# Altium PCB W5500_PCB.PcbDoc
Units mm, origin at the board's own origin, x right, y up, seen from the top; angles counter-clockwise.
Board outline 55.12 x 31.24 mm, 2 copper layers (Top Layer, Bottom Layer); 44 components, 37 nets, 156 pads, 37 vias.
Unrouted connection lines stored in the file: 1.
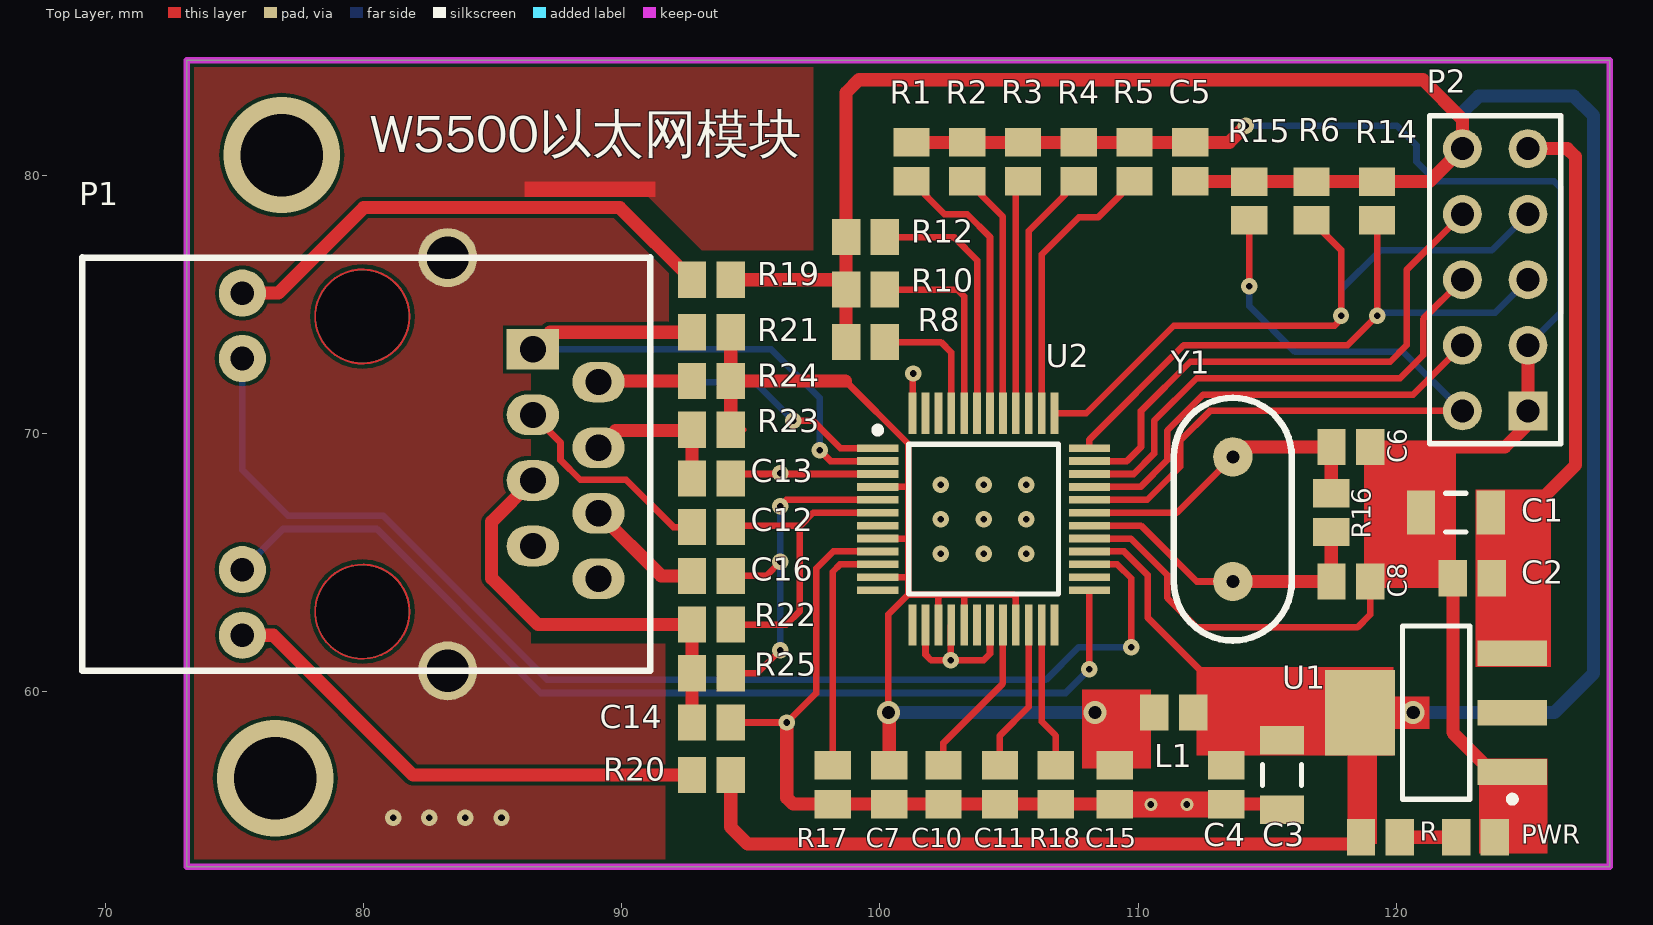
[diagram p0: Top Layer view]
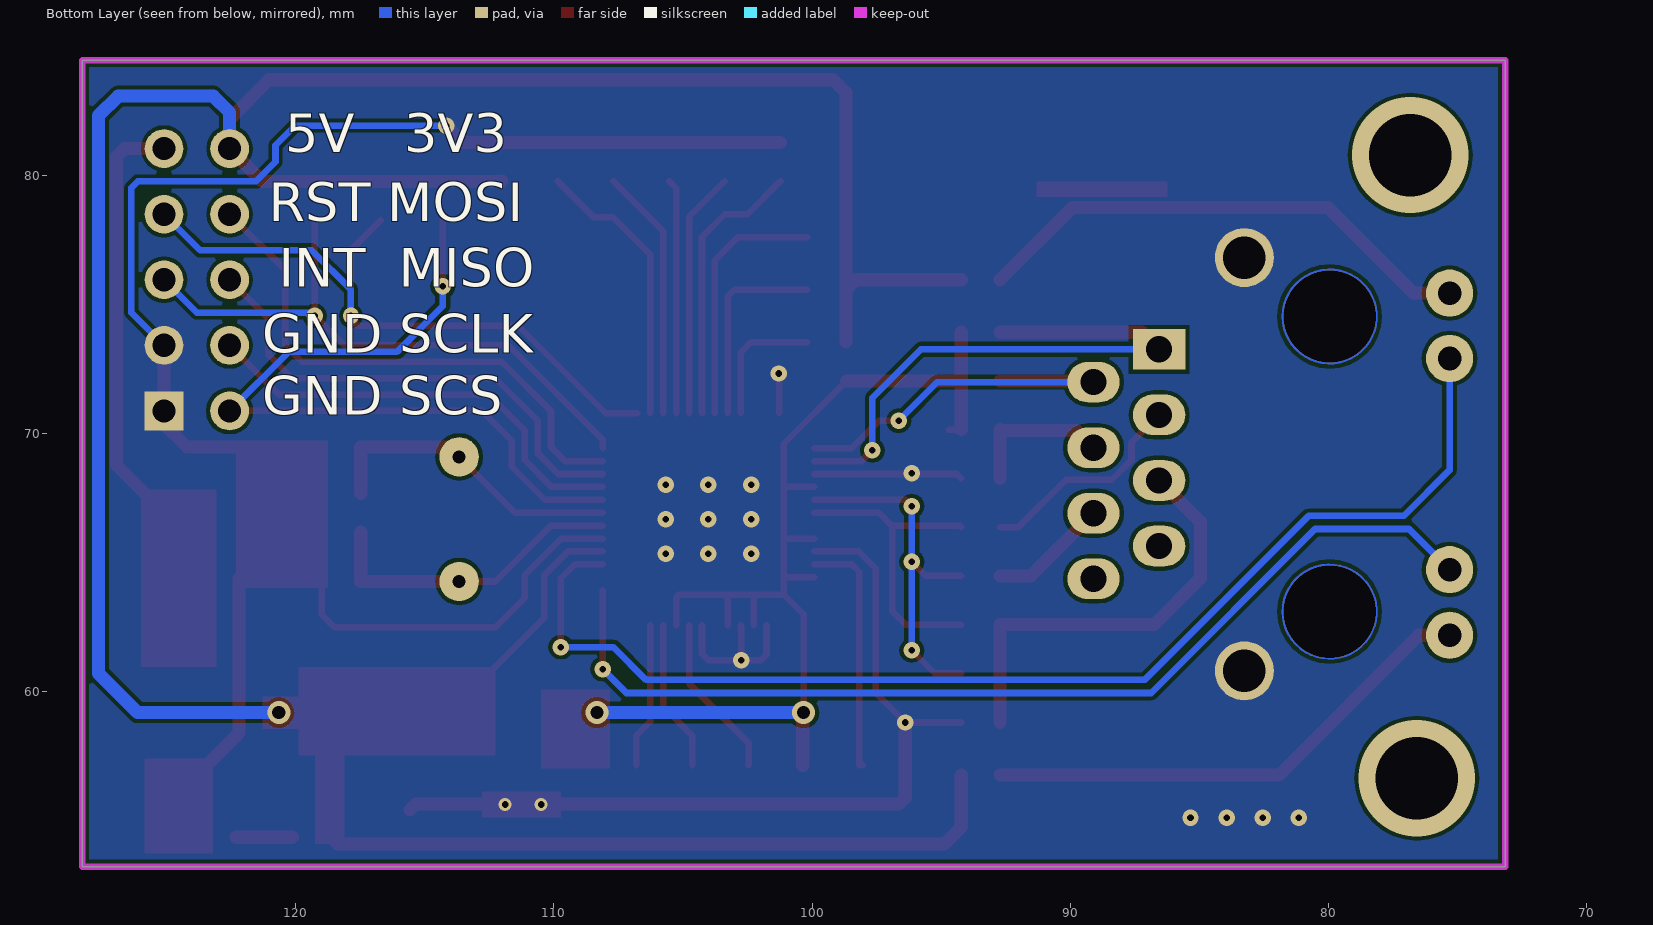
[diagram p1: Bottom Layer view, seen from below]

## Layer stack, top to bottom
Top Solder: solder mask 0.0102, Solder Resist, Dk 3.5
Top Layer: signal copper 0.0356
Dielectric 1: dielectric 0.32, FR-4, Dk 4.8
Bottom Layer: signal copper 0.0356
Bottom Solder: solder mask 0.0102, Solder Resist, Dk 3.5

## Board outline
73.152,53.213 73.152,84.455 128.27,84.455 128.27,53.213

## Design rules (kind name [scope] priority, off if disabled: settings)
Clearance [All] p1: gap=0.152 ignorepadtopadclearanceinfootprint=FALSE
DiffPairsRouting [All] p1: maxlimit=0.254 minlimit=0.127 mostfreqgap=0.254 toplayer_minwidth=0.051 toplayer_maxwidth=0.381 toplayer_prefwidth=0.381 bottomlayer_minwidth=0.051 bottomlayer_maxwidth=0.381 bottomlayer_prefwidth=0.381 maxuncoupledlength=12.7
PolygonConnect [All] p1: connectstyle=Direct reliefconductorwidth=0.254 reliefentries=4 polygonreliefangle="90 Angle" airgapwidth=0.254
RoutingVias [All] p1: holewidth=0.711 width=1.27 viastyle="Through Hole" minholewidth=5.08 minwidth=12.7 maxholewidth=0 maxwidth=0
SolderMaskExpansion [All] p1: expansion=0.076 istentingtop=FALSE
Width [All] p1: maxlimit=1.27 minlimit=0.254 preferedwidth=0.254
29 further rules are at their usual default settings.

## Components (designator, comment, footprint, x,y, rotation, side; value= is the part's Value field where it differs from the comment)
C1 "tanCap" C1206 122.301,66.929 r180 top value=10uF
C2 "Cap" C0805 122.936,64.389 r180 top value=0.1uF
C3 "tanCap" C1206 115.57,56.769 r270 top value=10uF
C4 "Cap" C0805 113.411,56.388 r270 top value=0.1uF
C5 "Cap" C0805 112.014,80.518 r90 top value=0.1uF
C6 "Cap" C0805 118.237,69.469 r180 top value=18pF
C7 "Cap" C0805 100.362,56.388 r270 top value=0.1uF
C8 "Cap" C0805 118.237,64.262 r180 top value=18pF
C10 "Cap" C0805 102.457,56.388 r270 top value=4.7uF
C11 "Cap" C0805 104.648,56.388 r270 top value=0.01uF
C12 "Cap" C0805 93.472,66.367 r0 top value=6.8nF
C13 "Cap" C0805 93.472,68.253 r180 top value=22nF
C14 "Cap" C0805 93.472,58.801 r180 top value=0.01uF
C15 "Cap" C0805 109.093,56.388 r90 top value=0.1uF
C16 "Cap" C0805 93.472,64.48 r0 top value=6.8nF
L1 "Inductor" C0805 111.379,59.182 r180 top value=1uH
P1 "HR911105A" HR911105A 86.561,73.254 r180 top
P2 "排针引出" HDR2X5 125.095,70.866 r90 top
PWR "POWER" C0805 123.063,54.356 r0 top (schematic designator D1)
R "Res2" C0805 119.38,54.356 r180 top value=1K (schematic designator R13)
R1 "Res2" C0805 101.219,80.518 r90 top value=10K
R2 "Res2" C0805 103.378,80.518 r90 top value=10K
R3 "Res2" C0805 105.537,80.518 r90 top value=10K
R4 "Res2" C0805 107.696,80.518 r90 top value=10K
R5 "Res2" C0805 109.855,80.518 r90 top value=10K
R6 "Res2" C0805 116.713,78.994 r90 top value=10K
R8 "Res2" C0805 99.441,73.533 r180 top value=10K
R10 "Res2" C0805 99.441,75.565 r180 top value=10K
R12 "Res2" C0805 99.441,77.597 r180 top value=10K
R14 "Res2" C0805 119.253,78.994 r90 top value=10K
R15 "Res2" C0805 114.3,78.994 r90 top value=10K
R16 "Res2" C0805 117.475,66.929 r90 top value=1M
R17 "Res2" C0805 98.171,56.388 r90 top value="12.4K 1%"
R18 "Res2" C0805 106.807,56.388 r90 top value=10K
R19 "Res2" C0805 93.472,75.946 r180 top value=1K
R20 "Res2" C0805 93.472,56.769 r180 top value=1K
R21 "Res2" C0805 93.472,73.914 r0 top value=51R
R22 "Res2" C0805 93.472,62.593 r0 top value=82R
R23 "Res2" C0805 93.472,70.14 r0 top value=51R
R24 "Res2" C0805 93.472,72.027 r0 top value=51R
R25 "Res2" C0805 93.472,60.706 r180 top value=82R
U1 "AMS1117-3.3" SOT223_M 121.539,59.182 r180 top
U2 "W5500" LQFP48 104.013,66.675 r90 top
Y1 "25MHz" XTAL-HC49 113.665,64.262 r90 top

## Footprints (in the part's own frame and the unit in brackets; to place one, negate y for a bottom-side part, rotate by r counter-clockwise, add the part's x,y. Pads: shape width x height; smd on the part's side, far side on the other; paste and mask are expansions set on the pad)
C0805 [mm] "Chip Capacitor, Body 2.0x1.3mm, IPC High Density"
  rect 1.1x1.4 smd: 1(-0.75,0) 2(0.75,0)
  body extent -1.1,-0.72 1.1,0.72, height 1.4
C1206 [mm] "Chip Capacitor, Body 3.2x1.6mm, IPC High Density"
  rect 1.1x1.7 smd: 1(-1.35,0) 2(1.35,0)
  silkscreen extent -0.4,-0.75 0.4,0.75, body extent -1.7,-0.9 1.7,0.9, height 1.3
HDR2X5 [mm] "Connector; Header; 5x2 Position"
  rect 1.5x1.5 hole 0.9: 1(0,0)
  round 1.5 hole 0.9: 2(0,2.54) 3(2.54,0) 4(2.54,2.54) 5(5.08,0) 6(5.08,2.54) 7(7.62,0) 8(7.62,2.54) 9(10.16,0) 10(10.16,2.54)
  silkscreen extent -1.27,-1.27 11.43,3.81
HR911105A [mil]
  rect 80x62 hole 40: 1(0,0)
  oval 80x62 hole 40: 2(-100,50) 3(0,100) 4(-100,150) 5(0,200) 6(-100,250) 7(0,300) 8(-100,350)
  round 72 hole 36: 9(442.91,-85.63) 10(442.91,14) 11(442.91,335.87) 12(442.91,436)
  round 90 hole 65: 13(129.92,-139.76) 14(129.92,490.16)
  Multi-Layer circle w5: c260,400 r70.8
  Multi-Layer circle w5: c260,-50 r70.8
  silkscreen extent -179,-140 687,490
LQFP48 [mm]
  rect 0.3x1.6 smd: 1(2.75,4.1) 2(2.25,4.1) 3(1.75,4.1) 4(1.25,4.1) 5(0.75,4.1) 6(0.25,4.1) 7(-0.25,4.1) 8(-0.75,4.1) 9(-1.25,4.1) 10(-1.75,4.1) 11(-2.25,4.1) 12(-2.75,4.1) 25(-2.75,-4.1) 26(-2.25,-4.1) 27(-1.75,-4.1) 28(-1.25,-4.1) 29(-0.75,-4.1) 30(-0.25,-4.1) 31(0.25,-4.1) 32(0.75,-4.1) 33(1.25,-4.1) 34(1.75,-4.1) 35(2.25,-4.1) 36(2.75,-4.1)
  rect 1.6x0.3 smd: 13(-4.1,2.75) 14(-4.1,2.25) 15(-4.1,1.75) 16(-4.1,1.25) 17(-4.1,0.75) 18(-4.1,0.25) 19(-4.1,-0.25) 20(-4.1,-0.75) 21(-4.1,-1.25) 22(-4.1,-1.75) 23(-4.1,-2.25) 24(-4.1,-2.75) 37(4.1,-2.75) 38(4.1,-2.25) 39(4.1,-1.75) 40(4.1,-1.25) 41(4.1,-0.75) 42(4.1,-0.25) 43(4.1,0.25) 44(4.1,0.75) 45(4.1,1.25) 46(4.1,1.75) 47(4.1,2.25) 48(4.1,2.75)
  silkscreen extent -2.9,-2.9 3.57,4.22
SOT223_M [mm] "SOT223, 4-Leads, Body 6.5x3.5mm, Pitch 2.3mm, Lead Span 7mm, IPC Low Density"
  rect 2.7x1 smd: 1(-2.95,2.3) 2(-2.95,0) 3(-2.95,-2.3)
  rect 2.7x3.3 smd: 4(2.95,0)
  silkscreen extent -3.08,-3.35 1.3,3.47, body extent -1.85,-3.35 1.85,3.35, height 1.7
XTAL-HC49 [mil]
  round 60 hole 19.68: 1(0,0) 2(190,0)
  silkscreen extent -90,-90 280,90

## Part data
C1 C3: library part "Cap Pol2", "Polarized Capacitor (Axial)", LatestRevisionDate=17-Jul-2002, LatestRevisionNote="Re-released for DXP Platform.", PackageDescription="Polarized Capacitor; 2 Leads", PackageReference=POLAR0.8, Published=8-Jun-2000, Publisher="Altium Limited"
C2 C4 C5 C6 C7 C8 C10 C11 C12 C13 C14 C15 C16: "Capacitor", LatestRevisionDate=17-Jul-2002, LatestRevisionNote="Re-released for DXP Platform.", PackageDescription="Radial Cap, Thru-Hole; 2 Leads; 0.3 in Pin Spacing", PackageReference=RAD-0.3, Published=8-Jun-2000, Publisher="Altium Limited"
P1: "RJ45²å×ù"
P2: library part "Header 5X2", "Header, 5-Pin, Dual row", LatestRevisionDate=17-Jul-2002, LatestRevisionNote="Re-released for DXP Platform.", Publisher="Altium Limited"
PWR: library part LED0, "Typical INFRARED GaAs LED", LatestRevisionDate=08-Jul-2005, LatestRevisionNote="Mech Layer 1 removed.", PackageDescription="LED; 2 Leads", PackageReference=LED-0, Published=8-Jun-2000, Publisher="Altium Limited"
R R1 R2 R3 R4 R5 R6 R8 R10 R12 R14 R15 R16 R17 R18 R19 R20 R21 R22 R23 R24 R25: "Resistor", LatestRevisionDate=17-Jul-2002, LatestRevisionNote="Re-released for DXP Platform.", PackageDescription="Axial Device, Thru-Hole; 2 Leads; 0.4 in Pin Spacing", PackageReference=AXIAL-0.4, Published=8-Jun-2000, Publisher="Altium Limited"
U1: library part AMS1117, "AMS1117-"
U2: "W5500ÒÔÌ«ÍøÐ¾Æ¬"
Y1: library part XTAL, "Crystal Oscillator", LatestRevisionDate=17-Jul-2002, LatestRevisionNote="Re-released for DXP Platform.", PackageDescription="Crystal, Thru-Hole; 2 Leads; Body 3.1 x 8.2 mm (Dia.xH)", PackageReference=R38, Published=8-Jun-2000, Publisher="Altium Limited"
L1: Code_IEC=1005, Code_JEITA=0402, LatestRevisionDate=29-May-2009, LatestRevisionNote="IPC-7351 Footprint Added.", PackageDescription="Chip Inductor", PackageReference=0402-A, Published=8-Jun-2000, Publisher="Altium Limited"

## Via types
v1: diameter 0.635, hole 0.254, Top Layer to Bottom Layer, 28 vias
v2: diameter 0.889, hole 0.508, Top Layer to Bottom Layer, 3 vias
v3: diameter 0.508, hole 0.254, Top Layer to Bottom Layer, 2 vias
v4: diameter 3.581, hole 3.581, Top Layer to Bottom Layer, 2 vias
v5: diameter 4.5, hole 3.2, Top Layer to Bottom Layer, 2 vias

## Nets (pads, with @x,y where several pads share a name; then routed paths per layer and width w, separated by ;. In a path a pad name is that pad's centre, name@x,y a point inside that pad or via, vN(x,y) a via of type N, cw(c..) or ccw(c..) an arc to the next point about the centre after c; other vN are vias at no path point)
/INT: P2.5 R14.1 U2.36 | length 23.6
  Top Layer w0.254: U2.36 108.113,69.759 111.76,73.406 118.11,73.406 v1(119.253,74.549) R14.1
  Bottom Layer w0.254: v1(119.253,74.549) 119.38,74.676 123.825,74.676 P2.5
/RESET: P2.7 R6.1 U2.37 | length 26.5
  Top Layer w0.254: U2.37 107.986,70.775 111.379,74.168 117.602,74.168 117.983,74.549 v1(117.856,74.549) 117.856,77.101 R6.1
  Bottom Layer w0.254: v1(117.856,74.549) 117.856,75.565 119.38,77.089 123.698,77.089 P2.7
/SPI-SCS: P2.2 R15.1 U2.32 | length 29.7
  Top Layer w0.254: U2.32 110.351,67.425 111.633,68.707 111.633,69.723 112.776,70.866 P2.2 ; v1(114.3,75.692) R15.1
  Bottom Layer w0.254: v1(114.3,75.692) 114.3,74.93 116.078,73.152 120.269,73.152 P2.2
ACTLED: P1.10 U2.27 | length 47.1
  Top Layer w0.254: U2.27 109.192,64.925 109.728,64.389 v1(109.728,61.722)
  Bottom Layer w0.254: P1.10 75.311,68.58 77.089,66.802 80.772,66.802 87.122,60.452 106.426,60.452 107.696,61.722 v1(109.728,61.722)
GND: C1.2 C2.2 C3.2 C4.2 C5.2 C6.1 C7.2 C8.1 C10.2 C11.2 C13.1 C14.1 C15.1 P1.13 P1.14 P2.1 P2.3 PWR.2 R1.2 R2.2 R3.2 R4.2 R5.2 R17.1 R18.1 U1.1 U2.3 U2.9 U2.14 U2.16 U2.19 U2.29 U2.48 | length 110.9
  Top Layer w0.254: C14.1 v1(96.393,58.801) 97.536,59.944 97.536,64.77 98.191,65.425 U2.9 ; C13.1 94.394,68.425 U2.3 ; U2.48 101.263,72.287 v1(101.293,72.316) ; U2.14 101.763,61.432 101.981,61.214 v1(102.743,61.214) ; U2.16 102.743,62.555 v1(102.743,61.214) ; U2.19 104.263,61.464 104.013,61.214 v1(102.743,61.214) ; U2.29 109.716,65.925 111.125,64.516 111.125,63.627 112.268,62.484 118.491,62.484 118.987,62.98 C8.1
  Top Layer w0.508: v1(96.393,58.801) 96.393,55.88 96.635,55.638 R17.1 R18.1 C15.1 C4.2 115.351,55.638 C3.2 ; R1.2 R2.2 R3.2 R4.2 R5.2 C5.2 113.526,81.268 v1(114.173,81.915) ; 121.412,69.469 124.206,69.469 125.095,70.358 P2.1 P2.3 ; C2.2 122.186,58.408 123.712,56.882 U1.1
  Bottom Layer w0.254: v1(114.173,81.915) 120.015,81.915 120.777,81.153 120.777,80.518 121.539,79.756 126.111,79.756 126.365,79.502 126.365,74.676 P2.3
  other v1: 81.153,55.118 82.55,55.118 83.947,55.118 85.344,55.118 102.362,65.341 104.013,65.341 105.664,65.341 102.362,66.675 104.013,66.675 105.664,66.675 102.362,68.008 104.013,68.008 105.664,68.008 96.139,68.453
  other v3: 110.49,55.626 111.887,55.626
LINKLED: P1.11 U2.25 | length 39.5
  Top Layer w0.254: v1(108.113,60.869) U2.25
  Bottom Layer w0.254: P1.11 76.882,66.294 80.518,66.294 86.868,59.944 107.188,59.944 v1(108.113,60.869)
NetC10_1: C10.1 U2.20 | length 6.4
  Top Layer w0.254: C10.1@102.477,57.158 C10.1 102.457,58.007 104.763,60.313 U2.20
NetD1_1: PWR.1 R.1 | length 2.2
  Top Layer w0.508: R.1 PWR.1
NetP1_9: P1.9 R19.2 | length 19.9
  Top Layer w0.508: P1.9 76.699,75.429 80.01,78.74 89.928,78.74 R19.2
NetP1_12: P1.12 R20.2 | length 19.7
  Top Layer w0.508: P1.12 76.505,62.179 81.915,56.769 R20.2
NetR1_1: R1.1 U2.42 | length 10.8
  Top Layer w0.254: R1.1 102.501,78.486 103.378,78.486 104.263,77.601 U2.42
NetR2_1: R2.1 U2.41 | length 9.6
  Top Layer w0.254: R2.1 104.763,78.383 U2.41
NetR3_1: R3.1 U2.40 | length 9.1
  Top Layer w0.254: U2.40 105.263,79.494 R3.1
NetR4_1: R4.1 U2.39 | length 9.8
  Top Layer w0.254: U2.39 105.763,77.835 R4.1
NetR5_1: R5.1 U2.38 | length 10.9
  Top Layer w0.254: U2.38 106.263,76.926 107.696,78.359 108.446,78.359 R5.1
NetR17_2: R17.2 U2.10 | length 9.4
  Top Layer w0.254: R17.2 98.171,64.643 98.453,64.925 U2.10
NetR18_2: R18.2 U2.23 | length 5.7
  Top Layer w0.254: U2.23 106.263,58.837 106.807,58.293 R18.2
PMODE0: R8.1 U2.45 | length 5.1
  Top Layer w0.254: R8.1 102.362,73.533 102.763,73.132 U2.45
PMODE1: R10.1 U2.44 | length 7.7
  Top Layer w0.254: R10.1 102.997,75.565 103.263,75.299 U2.44
PMODE2: R12.1 U2.43 | length 9.9
  Top Layer w0.254: R12.1 102.87,77.597 103.763,76.704 U2.43
RCT: C14.2 P1.5 R22.1 R25.2 | length 16.7
  Top Layer w0.508: P1.5 84.963,66.576 84.963,64.389 86.759,62.593 R22.1 R25.2 C14.2
RXN: C16.2 R25.1 U2.5 | length 13.9
  Top Layer w0.254: R25.1 95.25,60.706 v1(96.139,61.595) ; C16.2 95.595,64.48 v1(96.139,65.024) ; v1(96.139,67.183) 96.381,67.425 U2.5
  Bottom Layer w0.254: v1(96.139,61.595) v1(96.139,65.024) v1(96.139,67.183)
RXNNET: C16.1 P1.6 | length 4.6
  Top Layer w0.508: P1.6 91.525,64.48 C16.1
RXP: C12.2 R22.2 U2.6 | length 12.1
  Top Layer w0.254: R22.2 96.375,62.593 96.901,63.119 96.901,66.413 ; C12.2 94.269,66.413 96.901,66.413 ; U2.6 97.413,66.925 96.901,66.413
RXPNET: C12.1 P1.3 | length 8.4
  Top Layer w0.254: P1.3 87.63,69.645 87.63,68.961 88.392,68.199 90.17,68.199 92.002,66.367 C12.1
SPI-MISO: P2.6 U2.34 | length 19.1
  Top Layer w0.254: U2.34 109.827,68.425 110.617,69.215 110.617,70.485 112.268,72.136 120.142,72.136 121.031,73.025 121.031,74.422 P2.6
SPI-MOSI: P2.8 U2.35 | length 20.9
  Top Layer w0.254: U2.35 109.565,68.925 110.109,69.469 110.109,70.866 112.014,72.771 119.761,72.771 120.396,73.406 120.396,76.327 P2.8
SPI-SCLK: P2.4 U2.33 | length 17.4
  Top Layer w0.254: U2.33 110.089,67.925 111.125,68.961 111.125,70.104 112.522,71.501 120.65,71.501 P2.4
TCT: C13.2 P1.4 R23.1 | length 5.8
  Top Layer w0.508: P1.4 89.761,70.104 92.686,70.104 R23.1 C13.2
TXN: P1.2 R24.1 U2.1 | length 15.5
  Top Layer w0.254: v1(96.647,70.485) 97.409,70.485 98.469,69.425 U2.1
  Top Layer w0.508: P1.2 89.145,72.027 R24.1
  Bottom Layer w0.254: P1.2 95.148,71.984 v1(96.647,70.485)
TXP: P1.1 R21.1 U2.2 | length 22.8
  Top Layer w0.254: v1(97.663,69.342) 98.08,68.925 U2.2
  Top Layer w0.508: P1.1 87.221,73.914 91.186,73.914 R21.1
  Bottom Layer w0.254: P1.1 95.783,73.254 97.663,71.374 v1(97.663,69.342)
VCC-1V2: C11.1 U2.22 | length 5.9
  Top Layer w0.254: C11.1 104.648,58.293 105.763,59.408 U2.22
VCC-3V3A: C7.1 C15.2 L1.2 R21.2 R23.2 R24.2 U2.4 U2.8 U2.11 U2.15 U2.17 U2.21 | length 44.1
  Top Layer w0.254: R23.2 R23.2@94.706,70.14 ; 98.661,72.027 101.092,69.596 101.092,67.818 101.092,65.913 ; U2.11 101.001,64.425 101.092,64.516 ; U2.8 101.08,65.925 101.092,65.913 ; U2.4 100.985,67.925 ; v2(100.33,59.182) 100.33,62.992 101.092,63.754 ; U2.15 102.263,63.655 102.362,63.754 ; U2.17 103.263,63.742 103.251,63.754 ; U2.21 105.263,63.647 105.156,63.754 103.251,63.754 ; 101.092,63.754 101.092,64.516 ; 101.092,63.754 102.362,63.754 ; 101.092,64.516 101.092,65.913 ; 102.362,63.754 103.251,63.754
  Top Layer w0.508: R23.2 R24.2 ; R21.2 R24.2 ; 98.661,72.027 R24.2 ; v2(100.33,59.182) 100.362,59.15 C7.1
  Bottom Layer w0.508: v2(100.33,59.182) v2(108.331,59.182)
VCC-3V3D: C3.1 C4.1 C5.1 L1.1 P2.10 R6.2 R8.2 R10.2 R12.2 R14.2 R15.2 R19.1 R20.1 R.2 U1.2 U1.4 U2.28 | length 122.3
  Top Layer w0.254: U2.28 109.454,65.425 110.363,64.516 110.363,62.865 113.03,60.198
  Top Layer w0.508: R20.1 94.222,54.749 94.869,54.102 118.376,54.102 R.2 ; R19.1 98.31,75.946 R10.2 ; R8.2 R10.2 ; C5.1 112.038,79.744 R15.2 R6.2 R14.2 121.273,79.744 P2.10 122.555,82.169 121.031,83.693 99.187,83.693 98.691,83.197 R12.2 R10.2
  Bottom Layer w0.508: v2(120.65,59.182) 126.111,59.182 127.635,60.706 127.635,82.296 126.873,83.058 123.19,83.058 122.555,82.423 P2.10
VCC-5V: C1.1 C2.1 P2.9 U1.3 | length 15.8
  Top Layer w0.508: P2.9 126.619,81.026 126.936,80.709 126.936,68.77 125.603,67.437
XI: C8.2 R16.1 U2.30 Y1.1 | length 12.2
  Top Layer w0.254: U2.30 110.105,66.425 112.268,64.262 Y1.1
  Top Layer w0.508: Y1.1 C8.2 117.475,64.274 R16.1
XO: C6.2 R16.2 U2.31 Y1.2 | length 12.2
  Top Layer w0.254: U2.31 111.502,66.925 Y1.2
  Top Layer w0.508: Y1.2 114.046,69.469 C6.2 117.475,69.457 R16.2
pads on no net: P1.7 P1.8 U2.7 U2.12 U2.13 U2.18 U2.24 U2.26 U2.46 U2.47
copper on no net:
  other v4: 79.957,63.094 79.957,74.524
  other v5: 76.581,56.642 76.835,80.772

## Polygon pours and split planes (outlines as drawn)
GND on Bottom Layer "Bottom Layer-GND 1" (solid, pour order 24): 73.152,84.455 128.27,84.455 128.27,53.213 73.152,53.213
GND on Top Layer "Top Layer-GND" (solid, pour order 42): 86.487,78.326 86.487,74.193 91.796,74.193 91.821,74.168 91.821,76.2 89.662,78.359
GND on Top Layer "Top Layer-GND 2" (solid, pour order 38): 73.152,84.455 73.152,53.213 91.694,53.213 91.694,61.849 86.487,61.849 86.487,79.375 90.805,79.375 93.091,77.089 97.409,77.089 97.409,84.455

## Keep-outs
Keep-Out Layer:
  lines w0.254: 73.152,53.213 73.152,84.455 86.931,84.455 114.49,84.455 128.27,84.455 128.27,53.213 73.152,53.213

## Other copper
Top Layer:
  rectangle net GND: 118.745,64.008 122.301,69.723
  rectangle net GND: 109.728,55.118 112.776,56.134
  rectangle net GND: 86.233,79.154 91.313,79.756
  rectangle net VCC-3V3D: 118.11,54.102 119.253,57.785
  rectangle net GND: 123.19,53.721 125.857,57.404
  rectangle net VCC-3V3A: 107.823,57.023 110.49,60.071
  rectangle net VCC-3V3D: 112.268,57.531 119.888,60.96
  rectangle net VCC-3V3D: 119.888,58.547 121.285,59.817
  rectangle net VCC-5V: 123.063,60.96 125.984,67.818

## Silkscreen, mask and mechanical layers (free items; w line width, h text height)
Top Overlay:
  text "W5500以太网模块" at 80.264,80.391 h2.54
Bottom Overlay:
  text "5V   3V3" at 120.396,80.391 h2.54
  text "RST MOSI" at 121.031,77.724 h2.54
  text "INT  MISO" at 120.65,75.184 h2.54
  text "GND SCLK" at 121.285,72.644 h2.54
  text "GND SCS" at 121.285,70.231 h2.54